# EAGLE board 7G_controller (EAGLE 6.4)
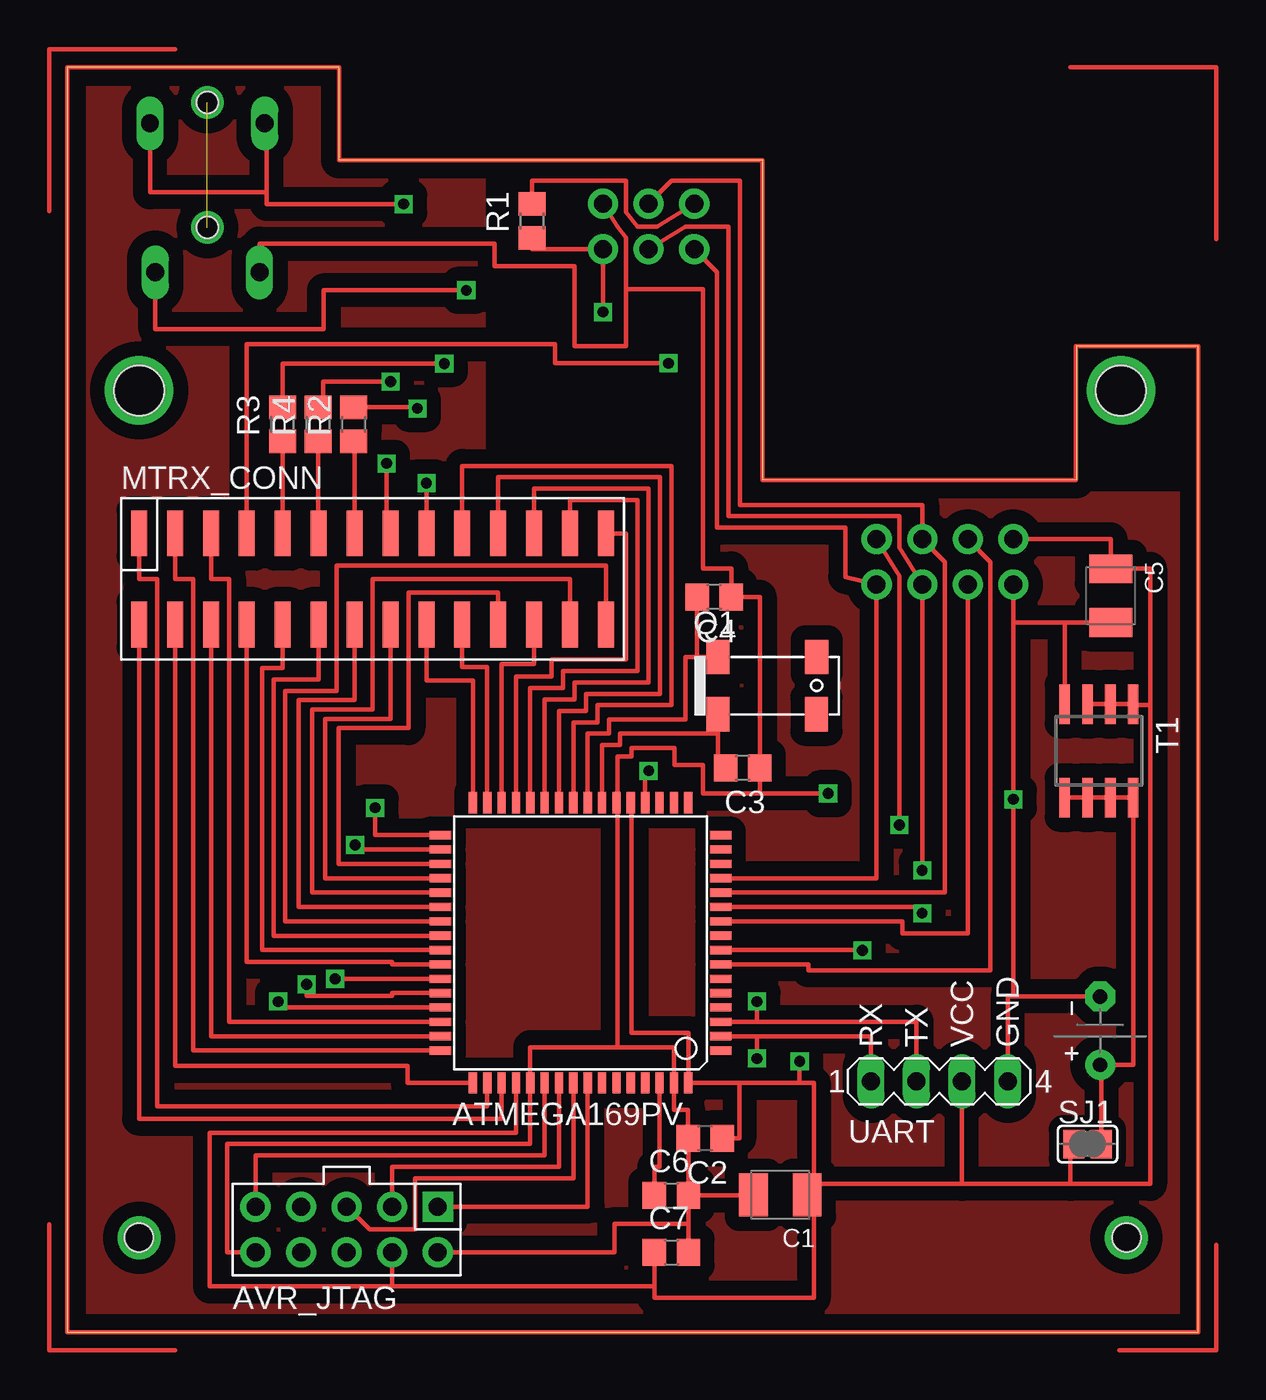
[diagram p0: board, top side]
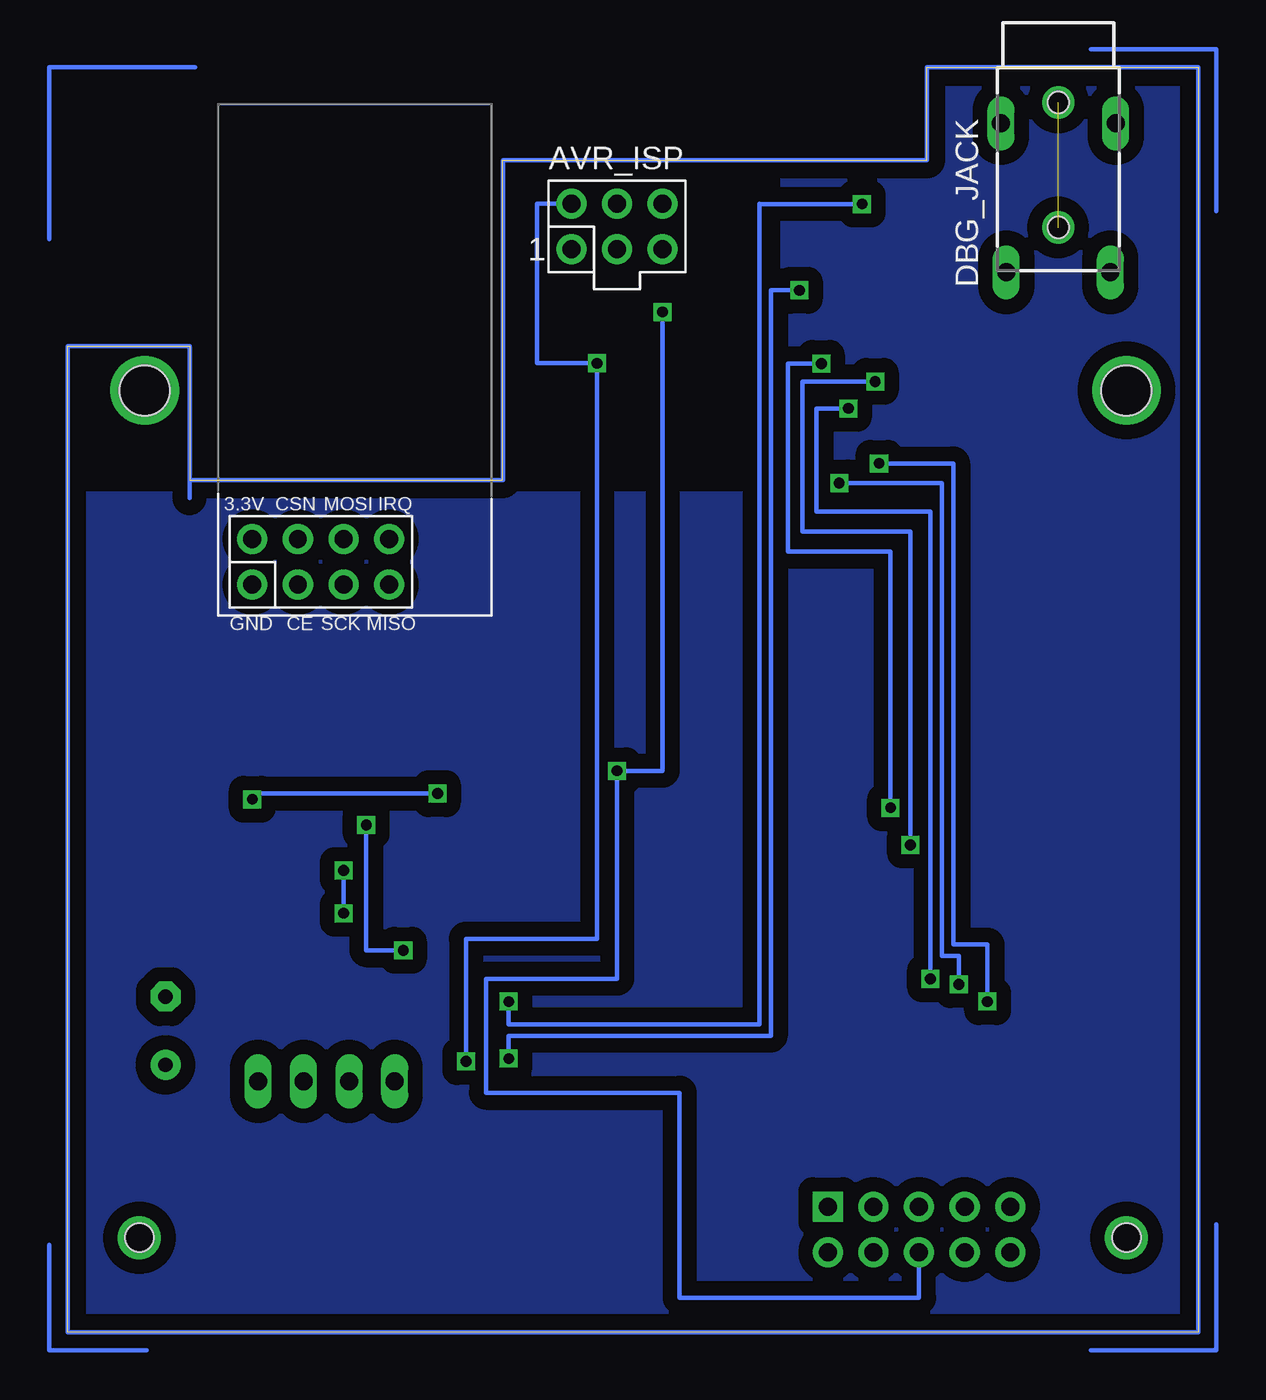
[diagram p1: board, bottom side, seen from below]

Size 63 x 70.46 mm. Coordinates in mm from the lower left corner, seen from the top.
Outline: 0,0 63,0 63,54.93 56.2,54.93 56.2,47.46 38.75,47.46 38.75,65.3 15.13,65.3 15.13,70.46 0,70.46 0,0
Copper layers (1*16): Top 0.035mm / dielectric 1.5mm / Bottom 0.035mm
Design rules "default *": minimum track width 10mil, minimum drill 0.6mm, track to track 10mil, track to pad 10mil, pad to pad 10mil, via to via 10mil, smd to smd 10mil, copper to edge 40mil, drill to drill 8mil, minimum pad ring 10mil, minimum via ring 8mil, stop-mask expansion 4mil, vias tented up to drill 0mil, thermal gap 10mil
Holes 1.6 mm at 4,5.26 59,5.26
Holes 2.8 mm at 4,52.46 58.7,52.46

## Footprints (pad centres in the part's own frame; a part is rotated, then mirrored left to right if it is on the bottom)
TQFP64 = smd 1.194 x 0.457: 1 -7.8,6; 2 -7.8,5.2; 3 -7.8,4.4; 4 -7.8,3.6; 5 -7.8,2.8; 6 -7.8,2; 7 -7.8,1.2; 8 -7.8,0.4; 9 -7.8,-0.4; 10 -7.8,-1.2; 11 -7.8,-2; 12 -7.8,-2.8; 13 -7.8,-3.6; 14 -7.8,-4.4; 15 -7.8,-5.2; 16 -7.8,-6; 33 7.8,-6; 34 7.8,-5.2; 35 7.8,-4.4; 36 7.8,-3.6; 37 7.8,-2.8; 38 7.8,-2; 39 7.8,-1.2; 40 7.8,-0.4; 41 7.8,0.4; 42 7.8,1.2; 43 7.8,2; 44 7.8,2.8; 45 7.8,3.6; 46 7.8,4.4; 47 7.8,5.2; 48 7.8,6 | smd 0.457 x 1.194: 17 -6,-7.8; 18 -5.2,-7.8; 19 -4.4,-7.8; 20 -3.6,-7.8; 21 -2.8,-7.8; 22 -2,-7.8; 23 -1.2,-7.8; 24 -0.4,-7.8; 25 0.4,-7.8; 26 1.2,-7.8; 27 2,-7.8; 28 2.8,-7.8; 29 3.6,-7.8; 30 4.4,-7.8; 31 5.2,-7.8; 32 6,-7.8; 49 6,7.8; 50 5.2,7.8; 51 4.4,7.8; 52 3.6,7.8; 53 2.8,7.8; 54 2,7.8; 55 1.2,7.8; 56 0.4,7.8; 57 -0.4,7.8; 58 -1.2,7.8; 59 -2,7.8; 60 -2.8,7.8; 61 -3.6,7.8; 62 -4.4,7.8; 63 -5.2,7.8; 64 -6,7.8
AVR-ISP-6-SMALL-FP = drill 1 pad 1.676: GND 2.54,1.27; MISO -2.54,-1.27; MOSI 0,1.27; RESET 2.54,-1.27; SCK 0,-1.27; VCC -2.54,1.27
AVR-JTAG = drill 1 pad 1.676 square: P$1 -1.27,5.08 | drill 1 pad 1.676: P$2 1.27,5.08; P$3 -1.27,2.54; P$4 1.27,2.54; P$5 -1.27,0; P$6 1.27,0; P$7 -1.27,-2.54; P$8 1.27,-2.54; P$9 -1.27,-5.08; P$10 1.27,-5.08
BATTERY = drill 0.8 pad 1.676: + -1.905,0 | drill 0.8 pad 1.676 octagon: - 1.905,0
SMC_B = smd 1.6 x 2.4: + -1.5,0; - 1.5,0
C0805 = smd 1.3 x 1.5: 1 -0.95,0; 2 0.95,0
JACK_CHEAP = drill 1 long: 1 -2.9,-8; 2 -3.2,0.3; 3 3.2,0.3; 4 2.9,-8 | hole 1.2: 0,1.46; 0,-5.5
SS7G_CONN_SMD = smd 0.89 x 2.54: 1 -13,2.54; 2 -11,2.54; 3 -9,2.54; 4 -7,2.54; 5 -5,2.54; 6 -3,2.54; 7 -1,2.54; 8 1,2.54; 9 3,2.54; 10 5,2.54; 11 7,2.54; 12 9,2.54; 13 11,2.54; 14 13,2.54; 15 -13,-2.54; 16 -11,-2.54; 17 -9,-2.54; 18 -7,-2.54; 19 -5,-2.54; 20 -3,-2.54; 21 -1,-2.54; 22 1,-2.54; 23 3,-2.54; 24 5,-2.54; 25 7,-2.54; 26 9,-2.54; 27 11,-2.54; 28 13,-2.54
NRF24L01_MOD_GENERIC = drill 1 pad 1.676: +3.3V 1.27,3.81; CE -1.27,1.27; CSN 1.27,1.27; GND -1.27,3.81; IRQ 1.27,-3.81; MISO -1.27,-3.81; MOSI 1.27,-1.27; SCK -1.27,-1.27
NSK_QUARTZ_CLOCK = smd 1.3 x 1.9: 1 -2.75,-1.6; 2 2.74,-1.6; 3 2.75,1.6; 4 -2.75,1.6
R0805 = smd 1.3 x 1.5: 1 -0.95,0; 2 0.95,0
SJ = smd 1.168 x 1.6: 1 -0.762,0; 2 0.762,0
SO8 = smd 0.6 x 2.2: 1 -1.905,-2.6; 2 -0.635,-2.6; 3 0.635,-2.6; 4 1.905,-2.6; 5 1.905,2.6; 6 0.635,2.6; 7 -0.635,2.6; 8 -1.905,2.6
UART_PORT = drill 1 long: +5V 1.27,0; GND 3.81,0; RX -3.81,0; TX -1.27,0

## Placement (x,y rotation side)
ATMEGA169PV  MEGA169-A  [TQFP64]  28.59,21.69 180 top
AVR_ISP  AVR-ISP-6SMALL_FP  [AVR-ISP-6-SMALL-FP]  32.38,61.6 0 bottom
AVR_JTAG  AVR-JTAG  [AVR-JTAG]  15.56,5.72 270 top
BAT1  [BATTERY]  57.54,16.79 90 top
C1  10uF  [SMC_B]  39.72,7.65 180 top
C2  100nF  [C0805]  35.54,10.8 180 top
C3  22pF  [C0805]  37.62,31.43 180 top
C4  22pF  [C0805]  36.04,40.96 180 top
C5  4.7uF  [SMC_B]  58.13,41.03 270 top
C6  100nF  [C0805]  33.66,7.62 0 top
C7  100nF  [C0805]  33.66,4.45 0 top
DBG_JACK  JACK_FEMALE_3.5MMCHEAP  [JACK_CHEAP]  7.8,67.04 0 bottom
MTRX_CONN  SS7G_CONNSMD  [SS7G_CONN_SMD]  17,41.96 0 top
NRF24L01  NRF24L01_MOD_NINE_EAGLESGENERIC  [NRF24L01_MOD_GENERIC]  48.9,42.91 90 bottom
Q1  32768Hz  [NSK_QUARTZ_CLOCK]  38.99,36.02 0 top
R1  10K  [R0805]  25.88,61.9 90 top
R2  470R  [R0805]  15.95,50.57 90 top
R3  470R  [R0805]  11.98,50.57 90 top
R4  470R  [R0805]  13.97,50.57 90 top
SJ1  [SJ]  56.83,10.48 0 top
T1  TPS1101D  [SO8]  57.47,32.38 180 top
UART  [UART_PORT]  48.58,13.97 0 top

## Library data of the parts
ATMEGA169PV = KileParts; MPN: ATMEGA169PV-8AU; OC_FARNELL: 1617046; OC_NEWARK: 03P4011
AVR_ISP AVR_JTAG BAT1 DBG_JACK MTRX_CONN NRF24L01 Q1 T1 = KileParts
C1-C7 R1-R4 = rcl
SJ1 = jumper
UART = KileParts; OC_FARNELL: unknown; OC_NEWARK: unknown

## Nets
AREF: ATMEGA169PV.62 C6.1
CAPS: ATMEGA169PV.43 R2.2
CE: ATMEGA169PV.10 NRF24L01.CE
CSN: ATMEGA169PV.7 NRF24L01.CSN
GND: ATMEGA169PV.22 ATMEGA169PV.53 ATMEGA169PV.63 AVR_ISP.GND AVR_JTAG.P$2 AVR_JTAG.P$10 BAT1.- C1.- C2.2 C3.1 C4.1 C5.- C6.2 C7.2 DBG_JACK.1 NRF24L01.GND T1.4 UART.GND
H18: ATMEGA169PV.42 MTRX_CONN.18
H19: ATMEGA169PV.41 MTRX_CONN.19
H20: ATMEGA169PV.40 MTRX_CONN.20
H21: ATMEGA169PV.38 MTRX_CONN.21
H22: ATMEGA169PV.36 MTRX_CONN.22
H25: ATMEGA169PV.35 MTRX_CONN.25
H27: ATMEGA169PV.37 MTRX_CONN.27
H28: ATMEGA169PV.39 MTRX_CONN.28
IRQ: ATMEGA169PV.8 NRF24L01.IRQ
L1: ATMEGA169PV.50 MTRX_CONN.1
L2: ATMEGA169PV.48 MTRX_CONN.2
L3: ATMEGA169PV.46 MTRX_CONN.3
L8: ATMEGA169PV.45 MTRX_CONN.8
L9: ATMEGA169PV.44 MTRX_CONN.9
L10: ATMEGA169PV.25 MTRX_CONN.10
L11: ATMEGA169PV.26 MTRX_CONN.11
L12: ATMEGA169PV.27 MTRX_CONN.12
L13: ATMEGA169PV.28 MTRX_CONN.13
L14: ATMEGA169PV.29 MTRX_CONN.14
L15: ATMEGA169PV.51 MTRX_CONN.15
L16: ATMEGA169PV.49 MTRX_CONN.16
L17: ATMEGA169PV.47 MTRX_CONN.17
LEDCAPS: MTRX_CONN.7 R2.1
LEDNUM: MTRX_CONN.6 R4.1
LEDSCRL: MTRX_CONN.5 R3.1
MISO: ATMEGA169PV.13 AVR_ISP.MISO NRF24L01.MISO
MOSI: ATMEGA169PV.12 AVR_ISP.MOSI NRF24L01.MOSI
N$2: ATMEGA169PV.32 MTRX_CONN.23
N$4: BAT1.+ SJ1.2 T1.5 T1.6 T1.7 T1.8
N$6: ATMEGA169PV.23 C3.2 Q1.1
N$8: ATMEGA169PV.24 C4.2 Q1.4
N$20: ATMEGA169PV.30 MTRX_CONN.26
N$21: ATMEGA169PV.31 MTRX_CONN.24
N$29: ATMEGA169PV.2 DBG_JACK.4 UART.RX
N$30: ATMEGA169PV.3 DBG_JACK.2 DBG_JACK.3 UART.TX
NUML: ATMEGA169PV.33 R3.2
RESET: ATMEGA169PV.20 AVR_ISP.RESET AVR_JTAG.P$6 R1.1
SCK: ATMEGA169PV.11 AVR_ISP.SCK NRF24L01.SCK
SCRL: ATMEGA169PV.34 R4.2
TCK: ATMEGA169PV.57 AVR_JTAG.P$1
TDI: ATMEGA169PV.54 AVR_JTAG.P$9
TDO: ATMEGA169PV.55 AVR_JTAG.P$3
TMS: ATMEGA169PV.56 AVR_JTAG.P$5
VCC: ATMEGA169PV.21 ATMEGA169PV.52 ATMEGA169PV.64 AVR_ISP.VCC AVR_JTAG.P$4 C1.+ C2.1 C5.+ C7.1 MTRX_CONN.4 NRF24L01.+3.3V R1.2 SJ1.1 T1.1 T1.2 T1.3 UART.+5V

## Tracks (layer width: path | path; a pad name or v marks a point on that pad's centre or on a via)
AREF
  Top 0.254: ATMEGA169PV.62 32.99,9.21 32.7,9.21 | 32.7,9.21 | 32.7,9.21 C6.1
CAPS  (via drill 0.6)
  Top 0.254: v14.92,19.69 ATMEGA169PV.43 | R2.2 19.5,51.52 v19.5,51.46
  Bottom 0.254: v19.5,51.46 21.27,51.46 21.27,45.72 14.92,45.72 v14.92,19.69
CE
  Top 0.254: NRF24L01.CE 50.16,22.23 46.51,22.23 46.51,22.89 ATMEGA169PV.10
CSN
  Top 0.254: NRF24L01.CSN 51.44,42.91 51.44,20.16 41.27,20.16 41.27,20.48 ATMEGA169PV.7
DRILL1  (via drill 1.6)
  other vias: 4,5.26
DRILL2  (via drill 1.6)
  other vias: 59,5.26
DRILL3  (via drill 2.8)
  other vias: 58.7,52.46
DRILL4  (via drill 2.8)
  other vias: 4,52.46
GND  (via drill 0.6)
  Top 0.254: AVR_ISP.GND 30.64,61.6 31.11,60.96 31.11,58.1 | 31.11,58.1 35.4,58.1 35.4,42.55 36.99,42.55 C4.1 38.57,40.96 C3.1 38.57,30 | 30.64,15.88 33.79,15.88 ATMEGA169PV.63 33.79,12.38 34.59,12.38 C2.2 34.6,10.8 C6.2 | 30.64,15.88 25.79,15.88 ATMEGA169PV.53 25.79,10.48 8.89,10.48 8.89,4.45 AVR_JTAG.P$10 | UART.GND 52.39,18.7 52.7,18.7 | BAT1.- 52.7,18.7 | ATMEGA169PV.22 30.64,29.48 | 30.64,29.48 30.64,15.88 | 30.64,29.48 30.64,32.07 31.43,32.07 31.43,32.54 33.81,32.54 33.81,31.59 35.4,31.59 35.4,30 38.57,30 | NRF24L01.GND 52.7,39.53 | 52.7,39.53 v52.7,29.69 52.7,18.7 | C5.- 55.56,39.53 | 55.56,39.53 52.7,39.53 | C6.2 34.6,6.03 | 34.6,6.03 C7.2 | C6.2 38.22,7.62 C1.- | v42.39,30 38.57,30 | 31.11,58.1 31.11,54.93 28.26,54.93 28.26,59.37 23.81,59.37 23.81,60.64 10.7,60.64 DBG_JACK.1 | AVR_JTAG.P$2 30.48,4.45 30.48,6.03 34.6,6.03 | T1.4 55.56,39.53
  Bottom 0.254: v52.7,29.69 52.7,30 v42.39,30
H18
  Top 0.254: MTRX_CONN.18 10,20.64 18.1,20.64 18.1,20.48 ATMEGA169PV.42
H19
  Top 0.254: MTRX_CONN.19 12,36.98 10.86,36.98 10.86,21.29 ATMEGA169PV.41
H20
  Top 0.254: MTRX_CONN.20 14,36.35 11.5,36.35 11.5,22.09 ATMEGA169PV.40
H21
  Top 0.254: MTRX_CONN.21 16,35.21 12.87,35.21 12.87,23.69 ATMEGA169PV.38
H22
  Top 0.254: MTRX_CONN.22 18,34.17 14.37,34.17 14.37,25.29 ATMEGA169PV.36
H25
  Top 0.254: MTRX_CONN.25 24,41.21 19,41.21 19,33.65 15.12,33.65 15.12,26.09 ATMEGA169PV.35
H27
  Top 0.254: MTRX_CONN.27 28,41.96 17,41.96 17,34.69 13.62,34.69 13.62,24.48 ATMEGA169PV.37
H28
  Top 0.254: MTRX_CONN.28 30,42.71 15,42.71 15,35.73 12.12,35.73 12.12,22.89 ATMEGA169PV.39
IRQ  (via drill 0.6)
  Top 0.254: NRF24L01.IRQ 46.35,42.12 v46.35,28.26 | v44.29,21.27 44.29,21.29 ATMEGA169PV.8
  Bottom 0.254: v46.35,28.26 46.35,21.27 v44.29,21.27
L1
  Top 0.254: MTRX_CONN.1 4,41.96 5,41.96 5,12.57 23.39,12.57 ATMEGA169PV.50
L2
  Top 0.254: MTRX_CONN.2 6,41.96 7,41.96 7,15.69 ATMEGA169PV.48
L3
  Top 0.254: MTRX_CONN.3 8,41.96 9,41.96 9,17.29 ATMEGA169PV.46
L8  (via drill 0.6)
  Top 0.254: MTRX_CONN.8 17.78,44.5 v17.78,48.4 | v11.75,18.41 11.75,18.09 ATMEGA169PV.45
  Bottom 0.254: v17.78,48.4 13.65,48.4 13.65,21.59 11.75,21.59 v11.75,18.41
L9  (via drill 0.6)
  Top 0.254: MTRX_CONN.9 v20,47.31 | ATMEGA169PV.44 18.1,18.89 18.1,18.73 13.34,18.73 v13.34,19.37
  Bottom 0.254: v20,47.31 14.29,47.31 14.29,20.96 13.34,20.96 v13.34,19.37
L10
  Top 0.254: MTRX_CONN.10 22,48.26 33.66,48.26 33.66,34.93 29.53,34.93 29.53,33.97 28.19,33.97 ATMEGA169PV.25
L11
  Top 0.254: MTRX_CONN.11 24,47.62 33.02,47.62 33.02,35.56 28.89,35.56 28.89,34.61 27.39,34.61 ATMEGA169PV.26
L12
  Top 0.254: MTRX_CONN.12 26,46.99 32.38,46.99 32.38,36.2 28.26,36.2 28.26,35.24 26.59,35.24 ATMEGA169PV.27
L13
  Top 0.254: MTRX_CONN.13 28,46.36 31.75,46.36 31.75,36.83 27.62,36.83 27.62,35.88 25.79,35.88 ATMEGA169PV.28
L14
  Top 0.254: MTRX_CONN.14 31.11,44.5 31.11,37.47 26.99,37.47 26.99,36.51 24.99,36.51 ATMEGA169PV.29
L15
  Top 0.254: MTRX_CONN.15 4,11.89 24.19,11.89 ATMEGA169PV.51
L16
  Top 0.254: MTRX_CONN.16 6,14.82 18.96,14.82 18.96,13.89 ATMEGA169PV.49
L17
  Top 0.254: MTRX_CONN.17 8,16.48 ATMEGA169PV.47
LEDCAPS
  Top 0.254: MTRX_CONN.7 16,48.92 R2.1
LEDNUM
  Top 0.254: R4.1 13.97,44.5 MTRX_CONN.6
LEDSCRL
  Top 0.254: R3.1 11.98,44.5 MTRX_CONN.5
MISO
  Top 0.254: AVR_ISP.MISO 36.2,59.05 36.2,44.81 43.34,44.81 43.34,42.07 NRF24L01.MISO 45.09,25.29 ATMEGA169PV.13
MOSI
  Top 0.254: AVR_ISP.MOSI 33.66,64.13 37.47,64.13 37.47,46.09 47.62,46.09 NRF24L01.MOSI 48.9,42.91 48.9,24.48 ATMEGA169PV.12
N$1
  Bottom 0.254: 56.2,47.46 38.73,47.46 38.73,65.3 15.13,65.3 15.13,70.46 0,70.46 0,0 63,0 63,54.93 56.2,54.93 56.2,46.46
N$2
  Top 0.254: MTRX_CONN.23 20,36.29 22.59,36.29 ATMEGA169PV.32
N$3
  Top 0.254: -1,62.46 -1,71.46 6,71.46
N$4
  Top 0.254: SJ1.2 57.59,14.89 BAT1.+ 59.37,14.89 T1.8 T1.7 T1.6 T1.5
N$6
  Top 0.254: ATMEGA169PV.23 29.79,32.7 30.8,32.7 30.8,33.34 36.2,33.34 36.2,34.42 Q1.1 36.24,31.43 C3.2
N$8
  Top 0.254: ATMEGA169PV.24 28.99,33.34 30.16,33.34 30.16,34.13 34.45,34.13 34.45,37.62 35.09,37.62 | 35.09,37.62 Q1.4 | C4.2 35.09,37.62
N$10
  Top 0.254: -1,6 -1,-1 6,-1
N$11
  Top 0.254: 58.59,-1 64.01,-1 64.01,4.87
N$12
  Top 0.254: 55.88,70.46 64.01,70.46 64.01,60.88
N$13
  Bottom 0.254: -1,62.46 -1,71.46 6,71.46
N$16
  Bottom 0.254: -1,6 -1,-1 6,-1
N$17
  Bottom 0.254: 58.59,-1 64.01,-1 64.01,4.87
N$18
  Bottom 0.254: 55.88,70.46 64.01,70.46 64.01,60.88
N$19
  Top 0.254: 0,0 0,70.46 15.13,70.46 15.13,65.3 38.73,65.3 38.73,47.46 56.2,47.46 56.2,54.93 63,54.93 63,0 0,0
N$20
  Top 0.254: MTRX_CONN.26 26,37.21 24.19,37.21 ATMEGA169PV.30
N$21
  Top 0.254: MTRX_CONN.24 22,37.04 23.39,37.04 ATMEGA169PV.31
N$23
  pour Bottom (isolate 0.813): 0.64,0.63 62.55,0.63 62.55,46.72 23.18,46.72 23.18,64.77 14.61,64.77 14.61,69.9 0.64,69.9
N$24
  pour Top (isolate 0.813): 0.64,0.63 62.55,0.63 62.55,46.72 23.18,46.72 23.18,64.77 14.61,64.77 14.61,69.9 0.64,69.9
N$25  (via drill 1.2)  (1 unrouted)
  other vias: 7.8,68.5 7.8,61.54
N$29  (via drill 0.6)
  Top 0.254: ATMEGA169PV.2 38.42,16.48 | 38.42,16.48 44.77,16.48 UART.RX | v38.42,15.24 38.42,16.48 | v22.23,58.04 14.29,58.04 14.29,55.88 4.9,55.88 DBG_JACK.4
  Bottom 0.254: v22.23,58.04 23.81,58.04 23.81,16.51 38.42,16.51 v38.42,15.24
N$30  (via drill 0.6)
  Top 0.254: ATMEGA169PV.3 38.42,17.29 | 38.42,17.29 47.31,17.29 UART.TX | v38.42,18.41 38.42,17.29 | 11.11,63.5 4.6,63.5 DBG_JACK.3 | v18.73,62.85 11.11,62.85 11.11,63.5 | 11.11,63.5 11.11,66.34 DBG_JACK.2
  Bottom 0.254: v18.73,62.85 24.45,62.85 | 24.45,62.85 24.45,62.87 | 24.45,62.85 24.45,17.14 38.42,17.14 v38.42,18.41
NUML  (via drill 0.6)
  Top 0.254: v17.14,29.21 17.14,27.69 ATMEGA169PV.33 | R3.2 11.98,53.96 v21,53.96
  Bottom 0.254: v17.14,29.21 17.14,43.5 22.86,43.5 22.86,53.97 v21,53.97 v21,53.96
RESET  (via drill 0.6)
  Top 0.254: v32.38,31.27 32.19,31.27 ATMEGA169PV.20 | v29.84,56.83 AVR_ISP.RESET 25.88,60.33 R1.1
  Bottom 0.254: v29.84,56.83 29.84,31.27 v32.38,31.27 32.38,19.69 39.69,19.69 39.69,13.34 28.89,13.34 28.89,1.91 15.56,1.91 AVR_JTAG.P$6
SCK  (via drill 0.6)
  Top 0.254: AVR_ISP.SCK 34.45,61.6 36.83,61.6 36.83,45.46 46.35,45.46 46.35,43.7 NRF24L01.SCK v47.62,25.72 | v47.62,23.34 47.62,23.69 ATMEGA169PV.11
  Bottom 0.254: v47.62,25.72 v47.62,23.34
SCRL  (via drill 0.6)
  Top 0.254: v16.03,27.15 16.03,26.89 ATMEGA169PV.34 | R4.2 14.25,51.52 14.25,52.96 v18,52.96
  Bottom 0.254: v16.03,27.15 16.03,44.61 22.07,44.61 22.07,52.96 v18,52.96
TCK
  Top 0.254: ATMEGA169PV.57 28.99,6.99 AVR_JTAG.P$1
TDI
  Top 0.254: AVR_JTAG.P$9 10.48,9.84 26.59,9.84 ATMEGA169PV.54
TDO
  Top 0.254: AVR_JTAG.P$3 18.1,9.21 27.39,9.21 ATMEGA169PV.55
TMS
  Top 0.254: AVR_JTAG.P$5 16.83,5.72 19.37,5.72 19.37,8.57 28.19,8.57 ATMEGA169PV.56
VCC  (via drill 0.6)
  Top 0.254: R1.2 25.88,64.13 31.11,64.13 31.11,62.39 31.75,61.6 32.86,61.6 AVR_ISP.VCC | MTRX_CONN.4 10,55.04 27.18,55.04 27.18,53.98 v33.5,53.98 | 37.44,13.89 ATMEGA169PV.64 34.59,16.67 31.43,16.67 31.43,29.48 ATMEGA169PV.21 | 49.85,8.25 UART.+5V | NRF24L01.+3.3V 58.13,44.17 C5.+ 60.33,42.53 60.33,34.93 | 37.44,13.89 37.44,10.8 C2.1 | 41.59,8.25 41.59,13.89 40.8,13.89 | 41.59,8.25 41.59,7.62 | 41.59,7.62 41.59,1.91 32.7,1.91 32.7,2.54 | C1.+ 40.96,7.65 40.96,7.62 41.59,7.62 | 32.7,2.54 C7.1 | 37.44,13.89 40.8,13.89 | 40.8,13.89 v40.8,15.08 | AVR_JTAG.P$4 18.1,2.54 | 18.1,2.54 32.7,2.54 | ATMEGA169PV.52 24.99,11.11 7.94,11.11 7.94,2.54 18.1,2.54 | 55.88,8.25 55.88,10.48 SJ1.1 | T1.3 T1.2 T1.1 59.37,34.93 60.33,34.93 | 60.33,34.93 60.33,8.25 55.88,8.25 | 55.88,8.25 49.85,8.25 | 49.85,8.25 41.59,8.25
  Bottom 0.254: v40.8,15.08 40.8,21.91 33.5,21.91 v33.5,53.98 36.83,53.98 36.83,62.87 AVR_ISP.VCC